# Altium PCB lt3001_eval.PcbDoc
Units mil, origin at the board's own origin, x right, y up, seen from the top; angles counter-clockwise.
Board outline 1850.39 x 748.03 mil, 2 copper layers (Top Layer, Bottom Layer); 25 components, 11 nets, 50 pads, 9 vias.
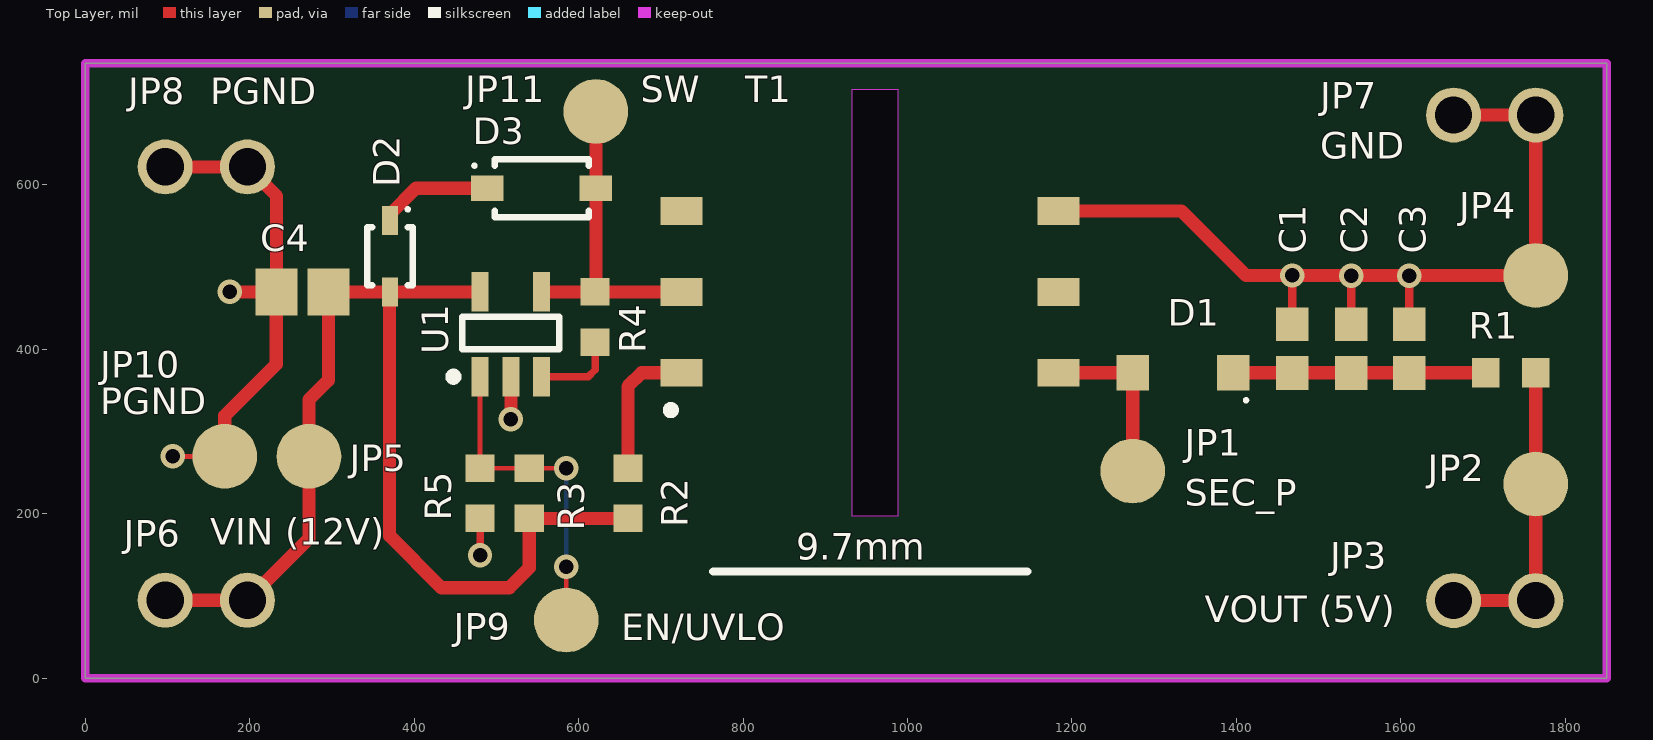
[diagram p0: Top Layer view]
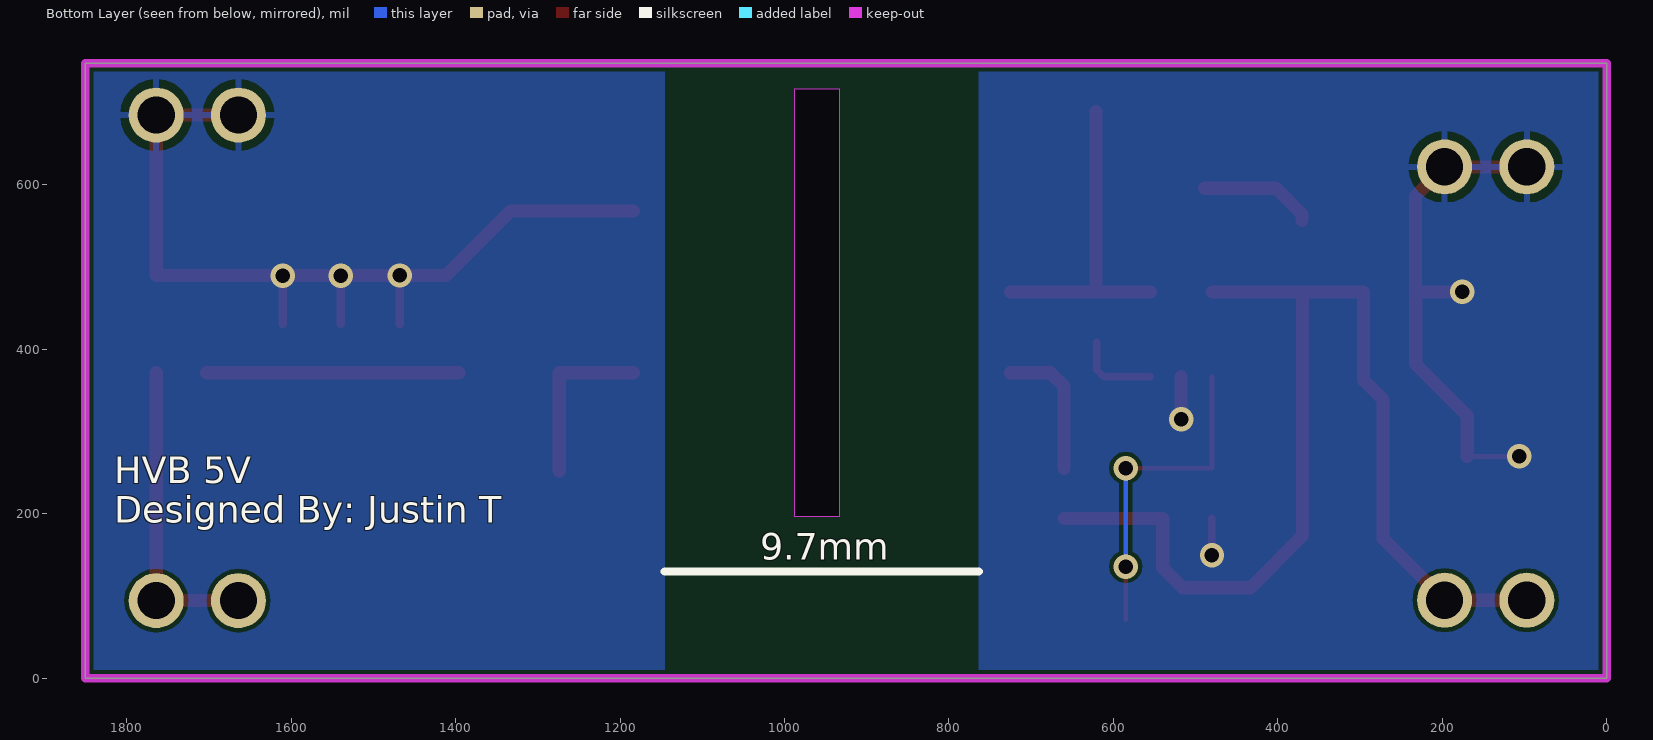
[diagram p1: Bottom Layer view, seen from below]
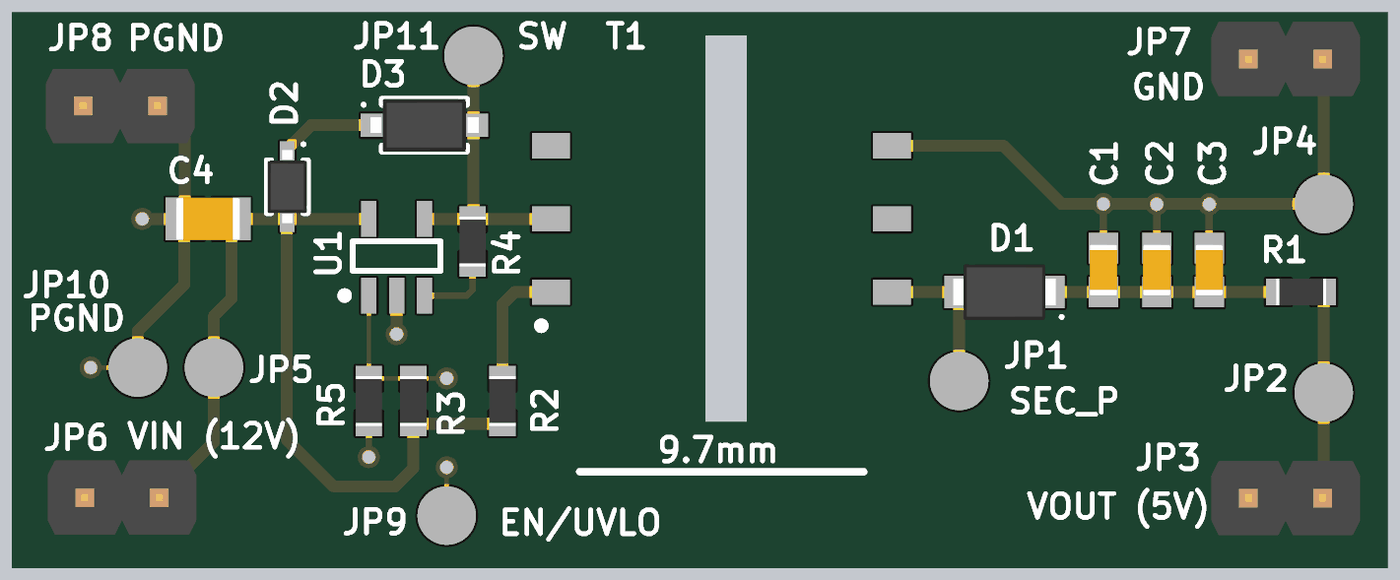
[diagram p2: 3D render of the assembled board from above, using the file's embedded part models]

## Layer stack, top to bottom
Top Solder: solder mask 0.4, Solder Resist, Dk 3.5
Top Layer: signal copper 1.4
Dielectric 1: dielectric 12.6, FR-4, Dk 4.8
Bottom Layer: signal copper 1.4
Bottom Solder: solder mask 0.4, Solder Resist, Dk 3.5

## Board outline
0,0 1850.39,0 1850.39,748.03 0,748.03
cut-out: 988.19,716.54 988.19,196.85 933.07,196.85 933.07,716.54

## Design rules (kind name [scope] priority, off if disabled: settings)
BoardOutlineClearance [All] p1: gap=7.87 ignorepadtopadclearanceinfootprint=FALSE
Clearance "Stitching HV_GND" [IsStitchingVia and InNet('HV_GND') vs (IsVia and (Not IsStitchingVia)) Or IsPad] p1: gap=5 ignorepadtopadclearanceinfootprint=FALSE
Clearance [All] p2: gap=5 ignorepadtopadclearanceinfootprint=FALSE except(7.87: Arc-SMDPad Track-SMDPad; 9.84: SMDPad-Hole THPad-Hole Via-Hole Fill-Hole Poly-Hole Region-Hole Text-Hole; 10: Arc-Via Arc-Hole Track-Via Track-Hole Via-Via; 12.99: Arc-THPad Track-THPad; 21.26: SMDPad-THPad THPad-THPad)
ComponentClearance [All] p1: gap=5 collisioncheckmode=3 verticalgap=5 showdistances=TRUE
DiffPairsRouting [All] p1: maxlimit=10 minlimit=5 mostfreqgap=5 toplayer_minwidth=5 toplayer_maxwidth=1000 toplayer_prefwidth=5 bottomlayer_minwidth=5 bottomlayer_maxwidth=1000 bottomlayer_prefwidth=5 maxuncoupledlength=500
Height [All] p1: minheight=0 maxheight=71497.94 prefheight=500
HoleSize [All] p1: absolutevalues=TRUE maxlimit=248.03 minlimit=11.81 maxpercent=80.000 minpercent=20.000
HoleToHoleClearance [All] p1: gap=9.84 allowstackedmicrovias=FALSE
MinimumAnnularRing [All] p1: minimumring=3
MinimumSolderMaskSliver [All] p1: minsoldermaskwidth=0
PlaneClearance [All] p1: clearance=5
PlaneConnect PlaneConnectPowerPads [InPadClass('PowerPads')] p1: planeconnectstyle=Direct reliefexpansion=20 reliefentries=4 reliefconductorwidth=10 reliefairgap=10
PlaneConnect [All] p2: pad.planeconnectstyle=Relief pad.reliefexpansion=11.81 pad.reliefentries=4 pad.reliefconductorwidth=10 pad.reliefairgap=5 via.planeconnectstyle=Direct via.reliefexpansion=11.81 via.reliefentries=4 via.reliefconductorwidth=5 via.reliefairgap=5
PolygonConnect PolygonConnectPowerPads [All vs (InPadClass('PowerPads'))] p1: connectstyle=Direct reliefconductorwidth=10 reliefentries=4 polygonreliefangle="90 Angle" airgapwidth=10
PolygonConnect [All] p2: thpad.connectstyle=Relief thpad.reliefconductorwidth=8 thpad.reliefentries=4 thpad.polygonreliefangle="90 Angle" thpad.airgapwidth=10 smdpad.connectstyle=Relief smdpad.reliefconductorwidth=8 smdpad.reliefentries=4 smdpad.polygonreliefangle="90 Angle" smdpad.airgapwidth=10 via.connectstyle=Direct via.reliefconductorwidth=8 via.reliefentries=4 via.polygonreliefangle="90 Angle" via.airgapwidth=10
RoutingVias [All] p1: holewidth=17.72 width=29.53 viastyle="Through Hole" minholewidth=11.81 minwidth=23.62 maxholewidth=23.62 maxwidth=259.84
SilkToSilkClearance [All] p1: silktosilkclearance=0
SilkToSolderMaskClearance [IsPad] p1: minsilkscreentomaskgap=0 clearancetoexposedcopper=TRUE
SolderMaskExpansion SolderMaskExpansion_Via [IsVia] p1: expansion=4 istentingtop=TRUE
SolderMaskExpansion [All] p2: expansion=2.95 istentingtop=FALSE
Width [All] p1: maxlimit=1000 minlimit=5.12 preferedwidth=6 minimp=50.000000 maximp=50.000000 favimp=50.000000
20 further rules are at their usual default settings.

## Components (designator, comment, footprint, x,y, rotation, side; value= is the part's Value field where it differs from the comment)
C1 "CL10A226MP8NUNE" CAP-0603 1467.87,401.1 r270 top
C2 "CL10A226MP8NUNE" CAP-0603 1539.68,401.1 r270 top
C3 "CL10A226MP8NUNE" CAP-0603 1610.24,401.1 r270 top
C4 "CL21A475KAQNNNE" CAP-0805 264.13,470 r0 top
D1 "SK64L-TP" Diode-SOD123W 1335,371.57 r180 top
D2 "CMDZ5250B TR PBFREE" DIODE-SOD323 370.63,513.31 r270 top
D3 "1N4148WTR" DIODE-SOD123 555,595.98 r0 top
JP1 "Testpoint2" TP2 1273.98,251.97 r0 top
JP2 "Testpoint2" TP2 1764.13,236.22 r0 top
JP3 "732-5315-ND" 2PIN-JP 1764.13,94.49 r180 top
JP4 "Testpoint2" TP2 1764.13,490 r0 top
JP5 "Testpoint2" TP2 272.01,270 r270 top
JP6 "732-5315-ND" 2PIN-JP 97.2,95 r0 top
JP7 "732-5315-ND" 2PIN-JP 1764.13,685.04 r180 top
JP8 "732-5315-ND" 2PIN-JP 197.2,622.05 r180 top
JP9 "Testpoint2" TP2 585,70.87 r0 top
JP10 "Testpoint2" TP2 169.65,270 r270 top
JP11 "Testpoint2" TP2 620.94,689.37 r0 top
R1 "0R" RES-0603 1733.62,371.57 r180 top
R2 "0R" RES-0603 660,225 r270 top
R3 "0R" RES-0603 540,225 r270 top
R4 "RMCF0603FT255K" RES-0603 620,439.49 r90 top
R5 "0R" RES-0603 480.2,225 r90 top
T1 "750315831" 750315831 725,371.57 r0 top
U1 "LT3001ES5#TRMPBF" SOT95P280X100-5N 480.2,366.85 r90 top

## Footprints (in the part's own frame and the unit in brackets; to place one, negate y for a bottom-side part, rotate by r counter-clockwise, add the part's x,y. Pads: shape width x height; smd on the part's side, far side on the other; paste and mask are expansions set on the pad)
2PIN-JP [mm]
  round 1.7 hole 1.15: 1(0,0) 2(2.54,0)
  body extent -1.24,-1.27 3.84,1.27, height 8.57
750315831 [mm]
  rect 1.3x0.86 smd: 1(0,0) 2(0,2.5) 3(0,5) 4(11.65,5) 5(11.65,2.5) 6(11.65,0)
  silkscreen extent -0.45,-1.28 -0.2,-1.03, body extent 0.74,-2.6 10.9,7.56, height 9.14
CAP-0603 [mm] "Chip Capacitor, 2-Leads, Body 1.60x0.80mm, IPC Medium Density"
  rect 1.05x1 smd: 1(-0.75,0) 2(0.75,0)
  body extent -0.87,-0.48 0.87,0.48, height 0.9
CAP-0805 [mm] "Chip Capacitor, 2-Leads, Body 2.00x1.25mm, IPC Medium Density"
  rect 1.3x1.45 smd: 1(-0.8,0) 2(0.8,0)
  body extent -1.1,-0.72 1.1,0.72, height 1.35
DIODE-SOD123 [mm] "SODFL, 2-Leads, Body 1.60x3.70mm, IPC Medium Density"
  rect 1x0.8 smd: 1(-1.675,0) 2(1.675,0)
  silkscreen extent -2.12,-0.9 1.45,0.9, body extent -1.85,-0.9 1.85,0.9, height 1.35
Diode-SOD123W [mm] "SODFL, 2-Leads, Body 1.70x3.50mm, IPC Medium Density"
  rect 1x1.1 smd: 1(-1.55,0) 2(1.55,0)
  silkscreen extent -2,0.8 -1.9,0.9, body extent -1.75,-0.95 1.75,0.95, height 1.1
DIODE-SOD323 [mm] "SODFL, 2-Leads, Body 1.25x2.50mm, IPC Medium Density"
  rect 0.9x0.5 smd: 1(-1.1,0) 2(1.1,0)
  silkscreen extent -1.5,-0.7 0.9,0.7, body extent -1.25,-0.67 1.25,0.67, height 1.1
RES-0603 [mm] "Chip Resistor, 2-Leads, Body 1.60x0.80mm, IPC Medium Density"
  rect 0.85x0.9 smd: 1(-0.775,0) 2(0.775,0)
  body extent -0.85,-0.45 0.85,0.45, height 0.55
SOT95P280X100-5N [mm] "SOT23, 5-Leads, Body 2.90x2.80mm, Pitch 0.95mm, IPC Medium Density"
  rect 1.22x0.52 smd: 1(0,0) 2(0,-0.95) 3(0,-1.9) 4(2.62,-1.9) 5(2.62,0)
  silkscreen extent -0.12,-2.45 1.85,0.95, body extent 0.48,-2.42 2.22,0.53, height 1
TP2 [mm]
  round 2 smd: 1(0,0)

## Part data
C1 C2 C3: library part Cap_22uf_10V_0603, "CAP CER 22UF 10V X5R 0603", Capacitance=22uF, Case Code (Imperial)=0603, Case Code (Metric)=1608, Dielectric=X5R, Manufacturer=Samsung, Max Operating Temperature=85°C, Min Operating Temperature=-55°C, Supplier Part Number 1=1276-1274-1-ND, Tolerance=20%, Voltage Rating=10V, Case/Package=0603, Category="Ceramic Capacitors", ComponentLink1Description=https://datasheet.ciiva.com/25711/cl10a226mp8nune-25711532.pdf?src-supplier=Digi-Key, ComponentLink1URL=https://datasheet.ciiva.com/25711/cl10a226mp8nune-25711532.pdf?src-supplier=Digi-Key, ComponentLink2Description=https://datasheet.ciiva.com/26838/getdatasheetpartid-746477-26838370.pdf?src-supplier=Verical, ComponentLink2URL=https://datasheet.ciiva.com/26838/getdatasheetpartid-746477-26838370.pdf?src-supplier=Verical, Construction=Flat, Contact Plating=Tin, Depth=0.8mm, Height=0.8mm, Lead Free="Lead Free", Length=1.6mm, Manufacturer Part Number=CL10A226MP8NUNE, Mount="Surface Mount", Packaging="Tape and Reel", Pricing 1="1=0.20000, 10=0.13900, 50=0.07900, 100=0.06550, 500=0.04590, 1000=0.03800 (USD)", Radiation Hardening=No, RoHS=Yes, RoHS Compliant=Yes, Schematic Label="22uF 10V", Series=CL, Stock 1=925394, Supplier 1=Digi-Key, Thickness=0.035inch, Width=0.031inch
C4: library part Cap_4.7uF_25V_0805, "CAP CER 4.7UF 25V X5R 0805", Capacitance=4.7uF, Case Code (Imperial)=0805, Case Code (Metric)=2012, Dielectric=X5R, Manufacturer=Samsung, Max Operating Temperature=85°C, Min Operating Temperature=-55°C, Package Quantity=1, Supplier Part Number 1=1276-1244-1-ND, Tolerance=10%, Voltage Rating=25V, Case/Package=0805, Category="Ceramic Capacitors", ComponentLink1Description=https://datasheet.ciiva.com/25798/cl21a475kaqnnne-25798882.pdf?src-supplier=Digi-Key, ComponentLink1URL=https://datasheet.ciiva.com/25798/cl21a475kaqnnne-25798882.pdf?src-supplier=Digi-Key, Construction=Flat, Depth=1.25mm, Height=1.25mm, Lead Free="Lead Free", Length=2mm, Manufacturer Part Number=CL21A475KAQNNNE, Mount="Surface Mount", Packaging="Tape and Reel", Pricing 1="1=0.11000, 10=0.08000, 50=0.04520, 100=0.03740, 500=0.02624, 1000=0.02172 (USD)", Radiation Hardening=No, RoHS=Yes, RoHS Compliant=Yes, Schematic Label="4.7uF 25V", Series=CL, Stock 1=5685991, Supplier 1=Digi-Key, Thickness=0.055inch, Voltage Rating (DC)=25V, Width=0.049inch
D1: library part Diode_Schottky_40V_6A, "6 AMP SCHOTTKY RECTIFIER 20 TO 100 VOLTS", Case/Package=100, Manufacturer=MCC, Supplier Part Number 1=SK64L-TPMSCT-ND, Category=Uncategorized, ComponentLink1Description=http://components.arrow.com/part/dataview/48985430S301820N2022?src-supplier=Arrow+Electronics, ComponentLink1URL=http://components.arrow.com/part/dataview/48985430S301820N2022?src-supplier=Arrow+Electronics, Manufacturer Part Number=SK64L-TP, Pricing 1="1=0.62000, 10=0.54400, 100=0.41740, 500=0.33000, 1000=0.26400 (USD)", RoHS=Yes, RoHS Compliant=Yes, Schematic Label="40V 6A", Stock 1=62, Supplier 1=Digi-Key
D2: library part Diode_Zener_20V_250mW, "Diode Zener Single 20V 5% 250mW 2-Pin SOD-323 T/R", Manufacturer="Central Semiconductor", Supplier Part Number 1=1514-CMDZ5250BTRPBFREECT-ND, Category="Zener Diodes", Manufacturer Part Number="CMDZ5250B TR PBFREE", Pricing 1="1=0.74000, 10=0.65300, 100=0.50090, 500=0.39600, 1000=0.31680 (USD)", RoHS=Yes, RoHS Compliant=Yes, Schematic Label="20V 250mW", Stock 1=9615, Supplier 1=Digi-Key
D3: library part Diode-75V-250mA, "Diode Gen Purp 75V 250MA SOD123", Average Rectified Current=250mA, Manufacturer=SMC, Max Reverse Voltage (DC)=75V, Supplier Part Number 1=7059449, Category="Rectifier Diodes", ComponentLink1Description=http://www.smc-diodes.com/propdf/1N4148W%20N0571%20REV.D.pdf?src-supplier=Digi-Key, ComponentLink1URL=http://www.smc-diodes.com/propdf/1N4148W%20N0571%20REV.D.pdf?src-supplier=Digi-Key, ComponentLink5Description=https://datasheet.ciiva.com/916/1n914bwt-916866.pdf?src-supplier=Digi-Key, ComponentLink5URL=https://datasheet.ciiva.com/916/1n914bwt-916866.pdf?src-supplier=Digi-Key, ComponentLink7Description=https://datasheet.ciiva.com/916/1n914bwt-916864.pdf?src-supplier=Digi-Key, ComponentLink7URL=https://datasheet.ciiva.com/916/1n914bwt-916864.pdf?src-supplier=Digi-Key, Manufacturer Part Number=1N4148WTR, Mount="Surface Mount", Packaging="Tape and Reel", Pricing 1="3000=0.01700, 12000=0.01430, 45000=0.01400, 90000=0.01380, 225000=0.01360 (USD)", Reverse Recovery Time=4ns, RoHS=No, Schematic Label="75V 250mA", Stock 1=3000, Supplier 1="Future Electronics"
JP1 JP2 JP4 JP5 JP9 JP10 JP11: "Single layer pad TP"
JP3 JP6 JP7 JP8: library part 2PIN-TEST, "CONN HEADER VERT 2POS 2.54MM"
R1 R2 R3 R5: library part 0603-0R, "RES SMD 0 OHM JUMPER 1/10W 0603", Case Code (Imperial)=0603, Case Code (Metric)=1608, Manufacturer=Yageo, Manufacturer Part Number=RC0603JR-070RL, Max Operating Temperature=155°C, Min Operating Temperature=-55°C, Package Quantity=5000, Power Rating=100mW, Resistance=0mR, Supplier Part Number 1=311-0.0GRCT-ND, Temperature Coefficient=200ppm/°C, Tolerance=1%, Voltage Rating=50V, Case/Package=0603, ComponentLink1Description=http://www.farnell.com/datasheets/2167052.pdf?src-supplier=Element14, ComponentLink1URL=http://www.farnell.com/datasheets/2167052.pdf?src-supplier=Element14, ComponentLink2Description=https://www.verical.com/server-webapp/html/getDatasheet?partID=329462&src-supplier=Verical, ComponentLink2URL=https://www.verical.com/server-webapp/html/getDatasheet?partID=329462&src-supplier=Verical, ComponentLink3Description=http://www.yageo.com/documents/recent/PYu-RC_Group_51_RoHS_L_9.pdf?src-supplier=Mouser, ComponentLink3URL=http://www.yageo.com/documents/recent/PYu-RC_Group_51_RoHS_L_9.pdf?src-supplier=Mouser, ComponentLink4Description=http://www.farnell.com/datasheets/443971.pdf?src-supplier=Element14, ComponentLink4URL=http://www.farnell.com/datasheets/443971.pdf?src-supplier=Element14, ComponentLink5Description=http://documents.rs-components.com/techlib://itc_doclist_GB.htm?stockno=6515918&src-supplier=RSComponents, ComponentLink5URL=http://documents.rs-components.com/techlib://itc_doclist_GB.htm?stockno=6515918&src-supplier=RSComponents, Composition="Thick Film", Contact Plating=Tin,Matte, Depth=0.8mm, Height=0.45mm, Lead Free="Lead Free", Length=1.6mm, Military Standard=Not, Number of Pins=2, Packaging="Tape and Reel", Pricing 1="1=0.1, 10=0.019, 25=0.0136, 50=0.0104, 100=0.0077, 250=0.00588, 500=0.00472, 1000=0.00347 (USD)", Radiation Hardening=No, REACH SVHC="No SVHC", Stock 1=25658294, Supplier 1=Digi-Key, Termination=SMD/SMT, Voltage Rating (DC)=50V, Width=0.8mm
R4: library part 0603-255KR, "Res Thick Film 0603 255K Ohm 1% 1/10W ±100ppm/°C Molded SMD SMD Paper T/R", Case Code (Imperial)=0603, Case Code (Metric)=1608, Manufacturer="Stackpole Electronics", Max Operating Temperature=155°C, Max Power Dissipation=100mW, Min Operating Temperature=-55°C, Resistance=255kR, Resistor Type="Thick Film", Supplier Part Number 1=RMCF0603FT255KCT-ND, Temperature Coefficient=100ppm/°C, Tolerance=1%, Case/Package=0603, Category="Chip SMD Resistors", ComponentLink1Description=https://www.seielect.com/catalog/SEI-Packaging.pdf?src-supplier=Digi-Key, ComponentLink1URL=https://www.seielect.com/catalog/SEI-Packaging.pdf?src-supplier=Digi-Key, ComponentLink2Description=https://www.seielect.com/Catalog/SEI-RMCF_RMCP.pdf?src-supplier=Digi-Key, ComponentLink2URL=https://www.seielect.com/Catalog/SEI-RMCF_RMCP.pdf?src-supplier=Digi-Key, ComponentLink3Description=http://components.arrow.com/part/dataview/40961324S7493834N1174?src-supplier=Arrow+Electronics, ComponentLink3URL=http://components.arrow.com/part/dataview/40961324S7493834N1174?src-supplier=Arrow+Electronics, ComponentLink4Description=https://www.seielect.com/catalog/SEI-RMCF_RMCP.pdf?src-supplier=Avnet, ComponentLink4URL=https://www.seielect.com/catalog/SEI-RMCF_RMCP.pdf?src-supplier=Avnet, ComponentLink5Description=https://www.verical.com/server-webapp/html/getDatasheet?partID=714409&src-supplier=Verical, ComponentLink5URL=https://www.verical.com/server-webapp/html/getDatasheet?partID=714409&src-supplier=Verical, Construction=Rectangular, Contact Plating=Tin,Matte, Depth=0.8mm, Features="Automotive AEC-Q200", Height=0.022inch, Length=0.061inch, Manufacturer Part Number=RMCF0603FT255K, Military Standard=Not, Mount="Surface Mount", Number of Terminations=2, Packaging="Tape and Reel", Pricing 1="1=0.10000, 10=0.01700, 100=0.00680, 1000=0.00305, 2500=0.00264 (USD)", Radiation Hardening=No, RoHS=Yes, RoHS Compliant=Yes, Schematic Label="255k 1%", Series=RMCF, Stock 1=69978, Supplier 1=Digi-Key, Width=0.031inch
T1: library part Xfmr_750315831, "Flyback Converters For For DC/DC Converters SMPS Transformer 1875Vrms Isolation 50 ~ 200kHz Surface Mount", Frequency=200kHz, Manufacturer="Wurth Electronics Midcom", Max Operating Temperature=125°C, Min Operating Temperature=-40°C, Supplier Part Number 1=1297-1244-1-ND, ComponentLink1Description=https://katalog.we-online.com/ctm/datasheet/750315831.pdf?src-supplier=Digi-Key, ComponentLink1URL=https://katalog.we-online.com/ctm/datasheet/750315831.pdf?src-supplier=Digi-Key, Manufacturer Part Number=750315831, Mount="Surface Mount", Packaging="Cut Tape", Pricing 1="1=2.64000, 10=2.50800, 50=2.33200, 100=2.11200 (USD)", RoHS=Yes, RoHS Compliant=No, Stock 1=388, Supplier 1=Digi-Key
U1: library part IC_LT3001, "DC/DC Cntrlr Single-OUT Flyback Automotive 5-Pin TSOT-23 T/R", Manufacturer="Analog Devices", Supplier Part Number 1=505-LT3001ES5#TRMPBFCT-ND, Category="Voltage Regulators - Switching", Manufacturer Part Number=LT3001ES5#TRMPBF, Pricing 1="1=5.73000, 10=5.14700, 25=4.86560, 100=4.21670, 250=4.00044 (USD)", RoHS=Yes, Supplier 1=Digi-Key

## Via types
v1: diameter 29.53, hole 17.72, Top Layer to Bottom Layer, tented both sides, 9 vias

## Nets (pads, with @x,y where several pads share a name; then routed paths per layer and width w, separated by ;. In a path a pad name is that pad's centre, name@x,y a point inside that pad or via, vN(x,y) a via of type N, cw(c..) or ccw(c..) an arc to the next point about the centre after c; other vN are vias at no path point)
+5: JP2.1 JP3.1 JP3.2 R1.1 | length 377.1
  Top Layer w16: JP3.2 JP3.1 JP2.1 R1.1
EN/UVLO: JP9.1 R3.1 R5.2 U1.1 | length 400.8
  Top Layer w6: U1.1 R5.2 R3.1 v1(585,255.51) ; JP9.1 v1(585,135.87)
  Bottom Layer w6: v1(585,135.87) v1(585,255.51)
GND: C1.1 C2.1 C3.1 JP4.1 JP7.1 JP7.2 T1.4 | length 1078.9
  Top Layer w10: C1.1 v1(1467.87,490) ; C2.1 v1(1539.68,489.68) ; C3.1 v1(1610.24,489.68)
  Top Layer w16: T1.4 1333.15,568.43 1411.57,490 v1@1460,490 ; v1@1461.63,490 v1@1462.53,489.09 ; v1(1467.87,490) JP4.1 JP7.1 JP7.2
NetC1_2: C1.2 C2.2 C3.2 D1.1 R1.2 | length 307.1
  Top Layer w16: D1.1 C1.2 C2.2 C3.2 R1.2
NetD1_2: D1.2 JP1.1 T1.6 | length 209.9
  Top Layer w16: T1.6 D1.2 JP1.1
NetD2_1: D2.1 D3.1 | length 139.3
  Top Layer w16: D2.1 370.63,564.49 402.13,595.98 D3.1
NetR2_1: R2.1 T1.1 | length 171.4
  Top Layer w16: R2.1 660,355 676.57,371.57 T1.1
PGND: C4.1 JP8.1 JP8.2 JP10.1 R5.1 U1.2 | length 709.9
  Top Layer w6: v1(106.3,270) JP10.1 ; C4.1@232.28,469.65 C4.1
  Top Layer w9: v1(480.2,149.61) R5.1
  Top Layer w16: JP8.2 JP8.1 232.64,586.61 C4.1 v1(175.63,470) ; JP10.1 169.65,319.25 232.28,381.89 C4.1@232.28,469.65 ; v1(517.6,315) U1.2
RFB: R4.1 U1.3 | length 102.4
  Top Layer w9: U1.3 611.85,366.85 620,375 R4.1
SW: D3.2 JP11.1 R4.2 T1.2 U1.4 | length 389.8
  Top Layer w6: R4.2 R4.2@620.94,470.94
  Top Layer w16: U1.4 R4.2 T1.2 ; R4.2@620.94,470.94 D3.2 JP11.1
VIN: C4.2 D2.2 JP5.1 JP6.1 JP6.2 R2.2 R3.2 U1.5 | length 1383.2
  Top Layer w16: JP6.1 JP6.2 272.01,169.8 JP5.1 272.01,338.94 295.63,362.56 C4.2 D2.2@370.08,470 ; U1.5 D2.2 D2.2@370.08,470 ; R2.2 R3.2 540,134.49 515.75,110.24 433.07,110.24 370.08,173.23 D2.2@370.08,470
pads on no net: T1.3 T1.5

## Polygon pours and split planes (outlines as drawn)
PGND on Bottom Layer "NONET_L-01_P-001" (solid, pour order 0): 0,771.65 763.78,771.65 763.78,0 0,0
GND on Bottom Layer "NONET_L-01_P-001" (solid, pour order 1): 1145.67,748.03 1850.39,748.03 1850.39,0 1145.67,0

## Keep-outs
Keep-Out Layer:
  the board outline again, w10

## Silkscreen, mask and mechanical layers (free items; w line width, h text height)
Top Overlay:
  lines w10: 763.78,129.92 1145.67,129.92
  text "SW" at 675.49,700.44 h32.2
  text "PGND" at 151.87,697.94 h32.2
  text "GND" at 1502.26,632.18 h32.2
  text "PGND" at 18.01,321.16 h32.2
  text "SEC_P" at 1336.91,209.84 h32.2
  text "VIN (12V)" at 151.87,162.6 h32.2
  text "9.7mm" at 864.47,144 h32.2
  text "VOUT (5V)" at 1361.47,68.11 h32.2
  text "EN/UVLO" at 651.87,46.23 h32.2
Bottom Overlay:
  lines w10: 763.78,129.92 1145.67,129.92
  text "HVB 5V / Designed By: Justin T" at 1814.96,188.98 h32.2
  text "9.7mm" at 1029.23,144 h32.2
BOARD OUTLINE:
  the board outline again, w10

## Dimensions
0,0 to 0,748.03 on Drill Drawing
0,748.03 to 1850.39,748.03 on Drill Drawing